# EAGLE board CCS811_Panel_ALLPCB (EAGLE 7.6.0)
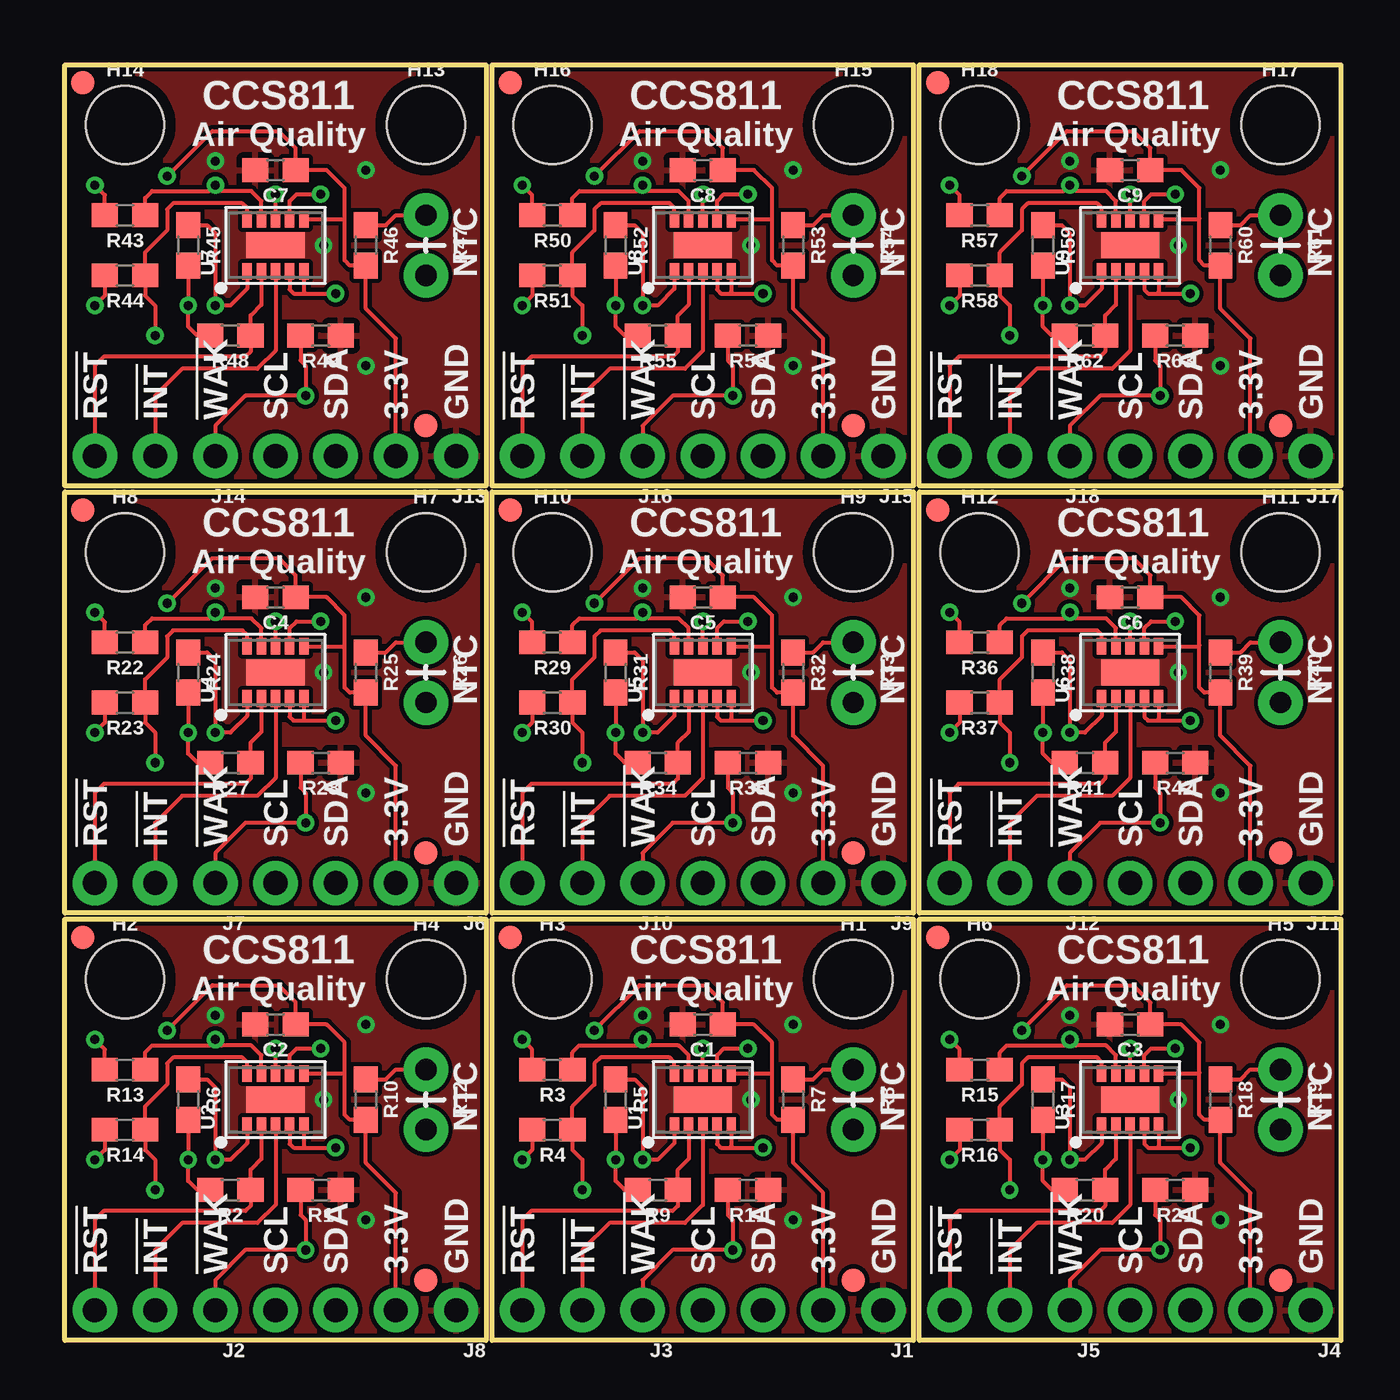
[diagram p0: board, top side]
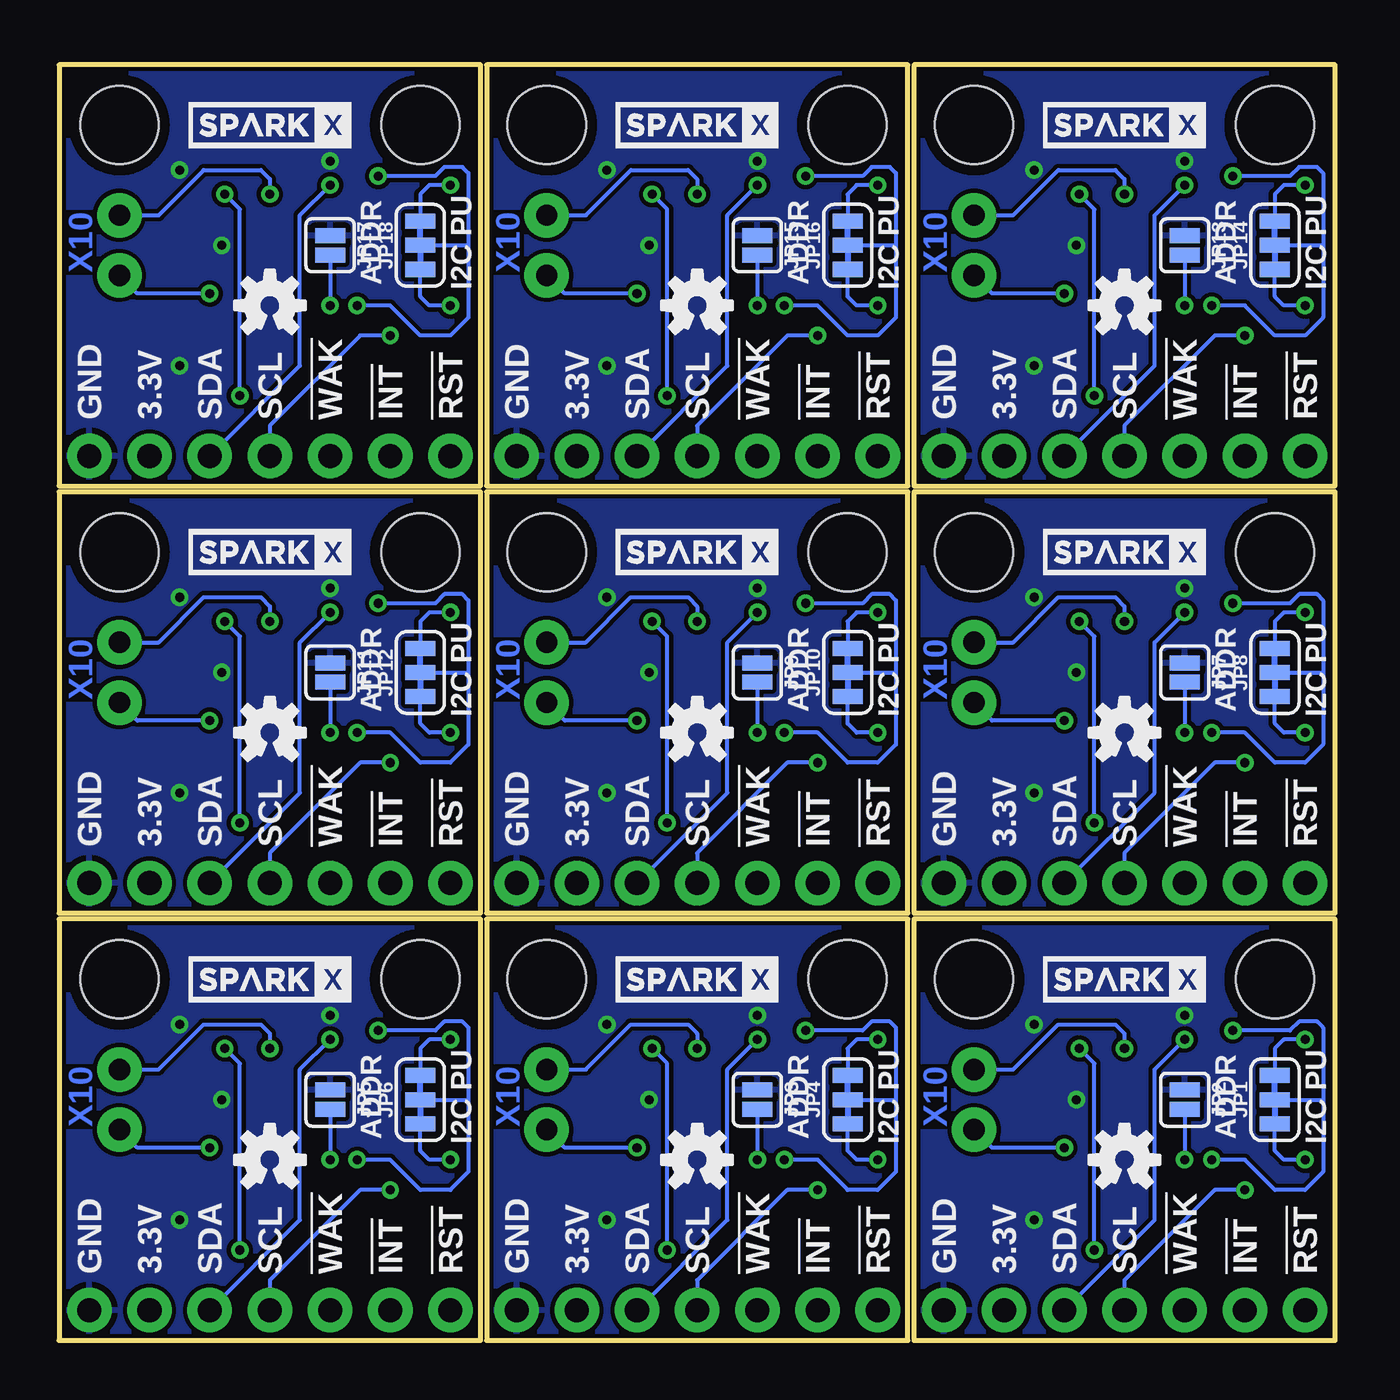
[diagram p1: board, bottom side, seen from below]

Size 53.85 x 53.85 mm. Coordinates in mm from the lower left corner, seen from the top.
Outline: 0,0 0,17.78 17.78,17.78 17.78,0 0,0
Outline: 18.03,0 18.03,17.78 35.81,17.78 35.81,0 18.03,0
Outline: 36.07,0 36.07,17.78 53.85,17.78 53.85,0 36.07,0
Outline: 0,18.03 0,35.81 17.78,35.81 17.78,18.03 0,18.03
Outline: 18.03,18.03 18.03,35.81 35.81,35.81 35.81,18.03 18.03,18.03
Outline: 36.07,18.03 36.07,35.81 53.85,35.81 53.85,18.03 36.07,18.03
Outline: 0,36.07 0,53.85 17.78,53.85 17.78,36.07 0,36.07
Outline: 18.03,36.07 18.03,53.85 35.81,53.85 35.81,36.07 18.03,36.07
Outline: 36.07,36.07 36.07,53.85 53.85,53.85 53.85,36.07 36.07,36.07
Copper layers (1*16): Top 0.035mm / dielectric 1.5mm / Bottom 0.035mm
Design rules "SparkFun-2-layer-TIGHT": minimum track width 7mil, minimum drill 15mil, track to track 7mil, track to pad 7mil, pad to pad 7mil, via to via 7mil, smd to smd 7mil, copper to edge 7mil, drill to drill 7mil, minimum pad ring 7mil, minimum via ring 7mil, stop-mask expansion 4mil, vias tented up to drill 25mil, thermal gap 10mil

## Footprints (pad centres in the part's own frame; a part is rotated, then mirrored left to right if it is on the bottom)
0603 = smd 1.1 x 1: 1 -0.85,0; 2 0.85,0
FIDUCIAL-1X2 = smd 1 x 1: 1 0,0
STAND-OFF = hole 3.302: 0,0
1X04_NO_SILK = drill 1.016 pad 1.88: 1 0,0; 2 2.54,0; 3 5.08,0; 4 7.62,0
1X03_NO_SILK = drill 1.016 pad 1.88: 1 0,0; 2 2.54,0; 3 5.08,0
SMT-JUMPER_3_2-NC_TRACE_SILK = smd 0.635 x 1.27: 1 -1.016,0; 2 0,0; 3 1.016,0
SMT-JUMPER_2_NO_SILK = smd 0.635 x 1.27: 1 -0.406,0; 2 0.406,0
AXIAL-0.1 = drill 0.9 pad 1.88: P$1 -1.27,0; P$2 1.27,0
LGA10 = smd 0.7 x 0.4: 1 -1.1,1.2; 2 -1.1,0.6; 3 -1.1,0; 4 -1.1,-0.6; 5 -1.1,-1.2; 6 1.1,-1.2; 7 1.1,-0.6; 8 1.1,0; 9 1.1,0.6; 10 1.1,1.2 | smd 1.1 x 2.45: EP 0,0

## Placement (x,y rotation side)
C1  1.0uF  [0603]  26.92,13.34 180 top
C2  1.0uF  [0603]  8.89,13.34 180 top
C3  1.0uF  [0603]  44.96,13.34 180 top
C4  1.0uF  [0603]  8.89,31.37 180 top
C5  1.0uF  [0603]  26.92,31.37 180 top
C6  1.0uF  [0603]  44.96,31.37 180 top
C7  1.0uF  [0603]  8.89,49.4 180 top
C8  1.0uF  [0603]  26.92,49.4 180 top
C9  1.0uF  [0603]  44.96,49.4 180 top
FD1  FIDUCIAL1X2  [FIDUCIAL-1X2]  0.76,17.02 0 top
FD2  FIDUCIAL1X2  [FIDUCIAL-1X2]  15.24,2.54 0 top
FD3  FIDUCIAL1X2  [FIDUCIAL-1X2]  18.8,17.02 0 top
FD4  FIDUCIAL1X2  [FIDUCIAL-1X2]  33.27,2.54 0 top
FD5  FIDUCIAL1X2  [FIDUCIAL-1X2]  36.83,17.02 0 top
FD6  FIDUCIAL1X2  [FIDUCIAL-1X2]  51.31,2.54 0 top
FD7  FIDUCIAL1X2  [FIDUCIAL-1X2]  0.76,35.05 0 top
FD8  FIDUCIAL1X2  [FIDUCIAL-1X2]  15.24,20.57 0 top
FD9  FIDUCIAL1X2  [FIDUCIAL-1X2]  18.8,35.05 0 top
FD10  FIDUCIAL1X2  [FIDUCIAL-1X2]  33.27,20.57 0 top
FD11  FIDUCIAL1X2  [FIDUCIAL-1X2]  36.83,35.05 0 top
FD12  FIDUCIAL1X2  [FIDUCIAL-1X2]  51.31,20.57 0 top
FD13  FIDUCIAL1X2  [FIDUCIAL-1X2]  0.76,53.09 0 top
FD14  FIDUCIAL1X2  [FIDUCIAL-1X2]  15.24,38.61 0 top
FD15  FIDUCIAL1X2  [FIDUCIAL-1X2]  18.8,53.09 0 top
FD16  FIDUCIAL1X2  [FIDUCIAL-1X2]  33.27,38.61 0 top
FD17  FIDUCIAL1X2  [FIDUCIAL-1X2]  36.83,53.09 0 top
FD18  FIDUCIAL1X2  [FIDUCIAL-1X2]  51.31,38.61 0 top
H1  STAND-OFF  [STAND-OFF]  33.27,15.24 0 top
H2  STAND-OFF  [STAND-OFF]  2.54,15.24 0 top
H3  STAND-OFF  [STAND-OFF]  20.57,15.24 0 top
H4  STAND-OFF  [STAND-OFF]  15.24,15.24 0 top
H5  STAND-OFF  [STAND-OFF]  51.31,15.24 0 top
H6  STAND-OFF  [STAND-OFF]  38.61,15.24 0 top
H7  STAND-OFF  [STAND-OFF]  15.24,33.27 0 top
H8  STAND-OFF  [STAND-OFF]  2.54,33.27 0 top
H9  STAND-OFF  [STAND-OFF]  33.27,33.27 0 top
H10  STAND-OFF  [STAND-OFF]  20.57,33.27 0 top
H11  STAND-OFF  [STAND-OFF]  51.31,33.27 0 top
H12  STAND-OFF  [STAND-OFF]  38.61,33.27 0 top
H13  STAND-OFF  [STAND-OFF]  15.24,51.31 0 top
H14  STAND-OFF  [STAND-OFF]  2.54,51.31 0 top
H15  STAND-OFF  [STAND-OFF]  33.27,51.31 0 top
H16  STAND-OFF  [STAND-OFF]  20.57,51.31 0 top
H17  STAND-OFF  [STAND-OFF]  51.31,51.31 0 top
H18  STAND-OFF  [STAND-OFF]  38.61,51.31 0 top
J1  [1X04_NO_SILK]  34.54,1.27 180 top
J2  [1X03_NO_SILK]  6.35,1.27 180 top
J3  [1X03_NO_SILK]  24.38,1.27 180 top
J4  [1X04_NO_SILK]  52.58,1.27 180 top
J5  [1X03_NO_SILK]  42.42,1.27 180 top
J6  [1X04_NO_SILK]  16.51,19.3 180 top
J7  [1X03_NO_SILK]  6.35,19.3 180 top
J8  [1X04_NO_SILK]  16.51,1.27 180 top
J9  [1X04_NO_SILK]  34.54,19.3 180 top
J10  [1X03_NO_SILK]  24.38,19.3 180 top
J11  [1X04_NO_SILK]  52.58,19.3 180 top
J12  [1X03_NO_SILK]  42.42,19.3 180 top
J13  [1X04_NO_SILK]  16.51,37.34 180 top
J14  [1X03_NO_SILK]  6.35,37.34 180 top
J15  [1X04_NO_SILK]  34.54,37.34 180 top
J16  [1X03_NO_SILK]  24.38,37.34 180 top
J17  [1X04_NO_SILK]  52.58,37.34 180 top
J18  [1X03_NO_SILK]  42.42,37.34 180 top
JP1  [SMT-JUMPER_3_2-NC_TRACE_SILK]  2.54,10.16 90 bottom
JP2  [SMT-JUMPER_2_NO_SILK]  6.35,10.16 270 bottom
JP3  [SMT-JUMPER_2_NO_SILK]  24.38,10.16 270 bottom
JP4  [SMT-JUMPER_3_2-NC_TRACE_SILK]  20.57,10.16 90 bottom
JP5  [SMT-JUMPER_2_NO_SILK]  42.42,10.16 270 bottom
JP6  [SMT-JUMPER_3_2-NC_TRACE_SILK]  38.61,10.16 90 bottom
JP7  [SMT-JUMPER_2_NO_SILK]  6.35,28.19 270 bottom
JP8  [SMT-JUMPER_3_2-NC_TRACE_SILK]  2.54,28.19 90 bottom
JP9  [SMT-JUMPER_2_NO_SILK]  24.38,28.19 270 bottom
JP10  [SMT-JUMPER_3_2-NC_TRACE_SILK]  20.57,28.19 90 bottom
JP11  [SMT-JUMPER_2_NO_SILK]  42.42,28.19 270 bottom
JP12  [SMT-JUMPER_3_2-NC_TRACE_SILK]  38.61,28.19 90 bottom
JP13  [SMT-JUMPER_2_NO_SILK]  6.35,46.23 270 bottom
JP14  [SMT-JUMPER_3_2-NC_TRACE_SILK]  2.54,46.23 90 bottom
JP15  [SMT-JUMPER_2_NO_SILK]  24.38,46.23 270 bottom
JP16  [SMT-JUMPER_3_2-NC_TRACE_SILK]  20.57,46.23 90 bottom
JP17  [SMT-JUMPER_2_NO_SILK]  42.42,46.23 270 bottom
JP18  [SMT-JUMPER_3_2-NC_TRACE_SILK]  38.61,46.23 90 bottom
LOGO1  OSHW-LOGOS  [OSHW-LOGO-S]  26.92,7.62 0 bottom
LOGO2  OSHW-LOGOS  [OSHW-LOGO-S]  44.96,7.62 0 bottom
LOGO3  OSHW-LOGOS  [OSHW-LOGO-S]  8.89,25.65 0 bottom
LOGO4  OSHW-LOGOS  [OSHW-LOGO-S]  8.89,7.62 0 bottom
LOGO5  OSHW-LOGOS  [OSHW-LOGO-S]  26.92,25.65 0 bottom
LOGO6  OSHW-LOGOS  [OSHW-LOGO-S]  44.96,25.65 0 bottom
LOGO7  OSHW-LOGOS  [OSHW-LOGO-S]  8.89,43.69 0 bottom
LOGO8  OSHW-LOGOS  [OSHW-LOGO-S]  26.92,43.69 0 bottom
LOGO9  OSHW-LOGOS  [OSHW-LOGO-S]  44.96,43.69 0 bottom
R1  100k  [0603]  10.79,6.35 180 top
R2  4.7k  [0603]  6.99,6.35 180 top
R3  4.7k  [0603]  20.57,11.43 180 top
R4  4.7k  [0603]  20.57,8.89 180 top
R5  100k  [0603]  23.24,10.16 270 top
R6  100k  [0603]  5.21,10.16 270 top
R7  10k  [0603]  30.73,10.16 270 top
R8  DNP  [AXIAL-0.1]  33.27,10.16 270 top
R9  4.7k  [0603]  25.02,6.35 180 top
R10  10k  [0603]  12.7,10.16 270 top
R11  100k  [0603]  28.83,6.35 180 top
R12  DNP  [AXIAL-0.1]  15.24,10.16 270 top
R13  4.7k  [0603]  2.54,11.43 180 top
R14  4.7k  [0603]  2.54,8.89 180 top
R15  4.7k  [0603]  38.61,11.43 180 top
R16  4.7k  [0603]  38.61,8.89 180 top
R17  100k  [0603]  41.27,10.16 270 top
R18  10k  [0603]  48.77,10.16 270 top
R19  DNP  [AXIAL-0.1]  51.31,10.16 270 top
R20  4.7k  [0603]  43.05,6.35 180 top
R21  100k  [0603]  46.86,6.35 180 top
R22  4.7k  [0603]  2.54,29.46 180 top
R23  4.7k  [0603]  2.54,26.92 180 top
R24  100k  [0603]  5.21,28.19 270 top
R25  10k  [0603]  12.7,28.19 270 top
R26  DNP  [AXIAL-0.1]  15.24,28.19 270 top
R27  4.7k  [0603]  6.99,24.38 180 top
R28  100k  [0603]  10.79,24.38 180 top
R29  4.7k  [0603]  20.57,29.46 180 top
R30  4.7k  [0603]  20.57,26.92 180 top
R31  100k  [0603]  23.24,28.19 270 top
R32  10k  [0603]  30.73,28.19 270 top
R33  DNP  [AXIAL-0.1]  33.27,28.19 270 top
R34  4.7k  [0603]  25.02,24.38 180 top
R35  100k  [0603]  28.83,24.38 180 top
R36  4.7k  [0603]  38.61,29.46 180 top
R37  4.7k  [0603]  38.61,26.92 180 top
R38  100k  [0603]  41.27,28.19 270 top
R39  10k  [0603]  48.77,28.19 270 top
R40  DNP  [AXIAL-0.1]  51.31,28.19 270 top
R41  4.7k  [0603]  43.05,24.38 180 top
R42  100k  [0603]  46.86,24.38 180 top
R43  4.7k  [0603]  2.54,47.5 180 top
R44  4.7k  [0603]  2.54,44.96 180 top
R45  100k  [0603]  5.21,46.23 270 top
R46  10k  [0603]  12.7,46.23 270 top
R47  DNP  [AXIAL-0.1]  15.24,46.23 270 top
R48  4.7k  [0603]  6.99,42.42 180 top
R49  100k  [0603]  10.79,42.42 180 top
R50  4.7k  [0603]  20.57,47.5 180 top
R51  4.7k  [0603]  20.57,44.96 180 top
R52  100k  [0603]  23.24,46.23 270 top
R53  10k  [0603]  30.73,46.23 270 top
R54  DNP  [AXIAL-0.1]  33.27,46.23 270 top
R55  4.7k  [0603]  25.02,42.42 180 top
R56  100k  [0603]  28.83,42.42 180 top
R57  4.7k  [0603]  38.61,47.5 180 top
R58  4.7k  [0603]  38.61,44.96 180 top
R59  100k  [0603]  41.27,46.23 270 top
R60  10k  [0603]  48.77,46.23 270 top
R61  DNP  [AXIAL-0.1]  51.31,46.23 270 top
R62  4.7k  [0603]  43.05,42.42 180 top
R63  100k  [0603]  46.86,42.42 180 top
U1  CCS811PRODUCTION  [LGA10]  26.92,10.16 90 top
U2  CCS811PRODUCTION  [LGA10]  8.89,10.16 90 top
U3  CCS811PRODUCTION  [LGA10]  44.96,10.16 90 top
U4  CCS811PRODUCTION  [LGA10]  8.89,28.19 90 top
U5  CCS811PRODUCTION  [LGA10]  26.92,28.19 90 top
U6  CCS811PRODUCTION  [LGA10]  44.96,28.19 90 top
U7  CCS811PRODUCTION  [LGA10]  8.89,46.23 90 top
U8  CCS811PRODUCTION  [LGA10]  26.92,46.23 90 top
U9  CCS811PRODUCTION  [LGA10]  44.96,46.23 90 top
U$1  SPARKX-LOGO3  [SPARKX-SMALL]  8.89,15.24 0 bottom
U$2  SPARKX-LOGO3  [SPARKX-SMALL]  26.92,15.24 0 bottom
U$3  SPARKX-LOGO3  [SPARKX-SMALL]  44.96,15.24 0 bottom
U$4  SPARKX-LOGO3  [SPARKX-SMALL]  8.89,33.27 0 bottom
U$5  SPARKX-LOGO3  [SPARKX-SMALL]  26.92,33.27 0 bottom
U$6  SPARKX-LOGO3  [SPARKX-SMALL]  44.96,33.27 0 bottom
U$7  SPARKX-LOGO3  [SPARKX-SMALL]  8.89,51.31 0 bottom
U$8  SPARKX-LOGO3  [SPARKX-SMALL]  26.92,51.31 0 bottom
U$9  SPARKX-LOGO3  [SPARKX-SMALL]  44.96,51.31 0 bottom

## Library data of the parts
C1-C9 = SparkFun-Capacitors; PROD_ID: CAP-00868
FD1-FD18 LOGO1-LOGO9 = SparkFun-Aesthetics
H1-H18 = SparkFun-Hardware
J1-J18 = SparkFun-Connectors
JP1-JP18 = SparkFun-Jumpers
R1 R5 R6 R11 R17 R21 R24 R28 R31 R35 R38 R42 R45 R49 R52 R56 R59 R63 = SparkFun-Resistors; PROD_ID: RES-07828
R2-R4 R9 R13-R16 R20 R22 R23 R27 R29 R30 R34 R36 R37 R41 R43 R44 R48 R50 R51 R55 R57 R58 R62 = SparkFun-Resistors; PROD_ID: RES-07857
R7 R10 R18 R25 R32 R39 R46 R53 R60 = SparkFun-Resistors; PROD_ID: RES-00824
R8 R12 R19 R26 R33 R40 R47 R54 R61 = esp32-environ-monitor-temp; PROD_ID: N/A; SF_ID: SEN-00250
U1-U9 U$1-U$9 = SparkX

## Nets
3.3V: C2.1 J8.2 JP1.2 R2.2 R6.2 R10.2 U2.6
3.3V1: C1.1 J1.2 JP4.2 R5.2 R7.2 R9.2 U1.6
3.3V2: C3.1 J4.2 JP6.2 R17.2 R18.2 R20.2 U3.6
3.3V3: C4.1 J6.2 JP8.2 R24.2 R25.2 R27.2 U4.6
3.3V4: C5.1 J9.2 JP10.2 R31.2 R32.2 R34.2 U5.6
3.3V5: C6.1 J11.2 JP12.2 R38.2 R39.2 R41.2 U6.6
3.3V6: C7.1 J13.2 JP14.2 R45.2 R46.2 R48.2 U7.6
3.3V7: C8.1 J15.2 JP16.2 R52.2 R53.2 R55.2 U8.6
3.3V8: C9.1 J17.2 JP18.2 R59.2 R60.2 R62.2 U9.6
!INT: J2.2 U2.3
!INT1: J3.2 U1.3
!INT2: J5.2 U3.3
!INT3: J7.2 U4.3
!INT4: J10.2 U5.3
!INT5: J12.2 U6.3
!INT6: J14.2 U7.3
!INT7: J16.2 U8.3
!INT8: J18.2 U9.3
!RST: J2.3 R2.1 U2.2
!RST1: J3.3 R9.1 U1.2
!RST2: J5.3 R20.1 U3.2
!RST3: J7.3 R27.1 U4.2
!RST4: J10.3 R34.1 U5.2
!RST5: J12.3 R41.1 U6.2
!RST6: J14.3 R48.1 U7.2
!RST7: J16.3 R55.1 U8.2
!RST8: J18.3 R62.1 U9.2
!WAKE: J2.1 R1.2 U2.7
!WAKE1: J3.1 R11.2 U1.7
!WAKE2: J5.1 R21.2 U3.7
!WAKE3: J7.1 R28.2 U4.7
!WAKE4: J10.1 R35.2 U5.7
!WAKE5: J12.1 R42.2 U6.7
!WAKE6: J14.1 R49.2 U7.7
!WAKE7: J16.1 R56.2 U8.7
!WAKE8: J18.1 R63.2 U9.7
AUX: R10.1 R12.P$1 U2.8
AUX1: R7.1 R8.P$1 U1.8
AUX2: R18.1 R19.P$1 U3.8
AUX3: R25.1 R26.P$1 U4.8
AUX4: R32.1 R33.P$1 U5.8
AUX5: R39.1 R40.P$1 U6.8
AUX6: R46.1 R47.P$1 U7.8
AUX7: R53.1 R54.P$1 U8.8
AUX8: R60.1 R61.P$1 U9.8
CCS811_ADDR: JP2.2 R6.1 U2.1
CCS811_ADDR1: JP3.2 R5.1 U1.1
CCS811_ADDR2: JP5.2 R17.1 U3.1
CCS811_ADDR3: JP7.2 R24.1 U4.1
CCS811_ADDR4: JP9.2 R31.1 U5.1
CCS811_ADDR5: JP11.2 R38.1 U6.1
CCS811_ADDR6: JP13.2 R45.1 U7.1
CCS811_ADDR7: JP15.2 R52.1 U8.1
CCS811_ADDR8: JP17.2 R59.1 U9.1
GND: C2.2 J8.1 JP2.1 R1.1 U2.EP
GND1: C1.2 J1.1 JP3.1 R11.1 U1.EP
GND2: C3.2 J4.1 JP5.1 R21.1 U3.EP
GND3: C4.2 J6.1 JP7.1 R28.1 U4.EP
GND4: C5.2 J9.1 JP9.1 R35.1 U5.EP
GND5: C6.2 J11.1 JP11.1 R42.1 U6.EP
GND6: C7.2 J13.1 JP13.1 R49.1 U7.EP
GND7: C8.2 J15.1 JP15.1 R56.1 U8.EP
GND8: C9.2 J17.1 JP17.1 R63.1 U9.EP
N$1: JP4.3 R3.2
N$2: JP4.1 R4.2
N$3: JP6.3 R15.2
N$4: JP1.3 R13.2
N$5: JP1.1 R14.2
N$6: JP6.1 R16.2
N$7: JP8.3 R22.2
N$8: JP8.1 R23.2
N$9: JP10.3 R29.2
N$10: JP10.1 R30.2
N$11: JP12.3 R36.2
N$12: JP12.1 R37.2
N$13: JP14.3 R43.2
N$14: JP14.1 R44.2
N$15: JP16.3 R50.2
N$16: JP16.1 R51.2
N$17: JP18.3 R57.2
N$18: JP18.1 R58.2
NTC_SENSE: R12.P$2 U2.4 U2.5
NTC_SENSE1: R8.P$2 U1.4 U1.5
NTC_SENSE2: R19.P$2 U3.4 U3.5
NTC_SENSE3: R26.P$2 U4.4 U4.5
NTC_SENSE4: R33.P$2 U5.4 U5.5
NTC_SENSE5: R40.P$2 U6.4 U6.5
NTC_SENSE6: R47.P$2 U7.4 U7.5
NTC_SENSE7: R54.P$2 U8.4 U8.5
NTC_SENSE8: R61.P$2 U9.4 U9.5
SCL: J8.4 R14.1 U2.10
SCL1: J1.4 R4.1 U1.10
SCL2: J4.4 R16.1 U3.10
SCL3: J6.4 R23.1 U4.10
SCL4: J9.4 R30.1 U5.10
SCL5: J11.4 R37.1 U6.10
SCL6: J13.4 R44.1 U7.10
SCL7: J15.4 R51.1 U8.10
SCL8: J17.4 R58.1 U9.10
SDA: J8.3 R13.1 U2.9
SDA1: J1.3 R3.1 U1.9
SDA2: J4.3 R15.1 U3.9
SDA3: J6.3 R22.1 U4.9
SDA4: J9.3 R29.1 U5.9
SDA5: J11.3 R36.1 U6.9
SDA6: J13.3 R43.1 U7.9
SDA7: J15.3 R50.1 U8.9
SDA8: J17.3 R57.1 U9.9

## Tracks (layer width: path | path; a pad name or v marks a point on that pad's centre or on a via)
3.3V  (via drill 0.38)
  Top 0.178: J8.2 13.97,6.22 12.7,7.49 R10.2 12.03,9.31 11.81,9.53 11.81,11.3 | U2.6 11.77,11.26 11.81,11.3 | v4.32,13.08 6.22,14.99 9.02,14.99 9.74,14.26 C2.1 11.05,13.34 11.81,12.57 11.81,11.3 | R6.2 v5.21,7.62 5.21,6.73 5.59,6.35 R2.2
  Bottom 0.178: v4.32,13.08 1.91,13.08 1.52,13.46 0.76,13.46 0.51,13.21 0.51,10.16 | 0.51,10.16 0.51,7.11 1.27,6.35 2.54,6.35 3.81,7.62 v5.21,7.62 | JP1.2 0.51,10.16
3.3V1  (via drill 0.38)
  Top 0.178: J1.2 32,6.22 30.73,7.49 R7.2 30.06,9.31 29.84,9.53 29.84,11.3 | U1.6 29.8,11.26 29.84,11.3 | v22.35,13.08 24.26,14.99 27.05,14.99 27.77,14.26 C1.1 29.08,13.34 29.84,12.57 29.84,11.3 | R5.2 v23.24,7.62 23.24,6.73 23.62,6.35 R9.2
  Bottom 0.178: v22.35,13.08 19.94,13.08 19.56,13.46 18.8,13.46 18.54,13.21 18.54,10.16 | 18.54,10.16 18.54,7.11 19.3,6.35 20.57,6.35 21.84,7.62 v23.24,7.62 | JP4.2 18.54,10.16
3.3V2  (via drill 0.38)
  Top 0.178: J4.2 50.04,6.22 48.77,7.49 R18.2 48.09,9.31 47.88,9.53 47.88,11.3 | U3.6 47.84,11.26 47.88,11.3 | v40.39,13.08 42.29,14.99 45.09,14.99 45.81,14.26 C3.1 47.12,13.34 47.88,12.57 47.88,11.3 | R17.2 v41.27,7.62 41.27,6.73 41.66,6.35 R20.2
  Bottom 0.178: v40.39,13.08 37.97,13.08 37.59,13.46 36.83,13.46 36.58,13.21 36.58,10.16 | 36.58,10.16 36.58,7.11 37.34,6.35 38.61,6.35 39.88,7.62 v41.27,7.62 | JP6.2 36.58,10.16
3.3V3  (via drill 0.38)
  Top 0.178: J6.2 13.97,24.26 12.7,25.53 R25.2 12.03,27.34 11.81,27.56 11.81,29.34 | U4.6 11.77,29.29 11.81,29.34 | v4.32,31.11 6.22,33.02 9.02,33.02 9.74,32.3 C4.1 11.05,31.37 11.81,30.61 11.81,29.34 | R24.2 v5.21,25.65 5.21,24.77 5.59,24.38 R27.2
  Bottom 0.178: v4.32,31.11 1.91,31.11 1.52,31.5 0.76,31.5 0.51,31.24 0.51,28.19 | 0.51,28.19 0.51,25.15 1.27,24.38 2.54,24.38 3.81,25.65 v5.21,25.65 | JP8.2 0.51,28.19
3.3V4  (via drill 0.38)
  Top 0.178: J9.2 32,24.26 30.73,25.53 R32.2 30.06,27.34 29.84,27.56 29.84,29.34 | U5.6 29.8,29.29 29.84,29.34 | v22.35,31.11 24.26,33.02 27.05,33.02 27.77,32.3 C5.1 29.08,31.37 29.84,30.61 29.84,29.34 | R31.2 v23.24,25.65 23.24,24.77 23.62,24.38 R34.2
  Bottom 0.178: v22.35,31.11 19.94,31.11 19.56,31.5 18.8,31.5 18.54,31.24 18.54,28.19 | 18.54,28.19 18.54,25.15 19.3,24.38 20.57,24.38 21.84,25.65 v23.24,25.65 | JP10.2 18.54,28.19
3.3V5  (via drill 0.38)
  Top 0.178: J11.2 50.04,24.26 48.77,25.53 R39.2 48.09,27.34 47.88,27.56 47.88,29.34 | U6.6 47.84,29.29 47.88,29.34 | v40.39,31.11 42.29,33.02 45.09,33.02 45.81,32.3 C6.1 47.12,31.37 47.88,30.61 47.88,29.34 | R38.2 v41.27,25.65 41.27,24.77 41.66,24.38 R41.2
  Bottom 0.178: v40.39,31.11 37.97,31.11 37.59,31.5 36.83,31.5 36.58,31.24 36.58,28.19 | 36.58,28.19 36.58,25.15 37.34,24.38 38.61,24.38 39.88,25.65 v41.27,25.65 | JP12.2 36.58,28.19
3.3V6  (via drill 0.38)
  Top 0.178: J13.2 13.97,42.29 12.7,43.56 R46.2 12.03,45.38 11.81,45.59 11.81,47.37 | U7.6 11.77,47.33 11.81,47.37 | v4.32,49.15 6.22,51.05 9.02,51.05 9.74,50.33 C7.1 11.05,49.4 11.81,48.64 11.81,47.37 | R45.2 v5.21,43.69 5.21,42.8 5.59,42.42 R48.2
  Bottom 0.178: v4.32,49.15 1.91,49.15 1.52,49.53 0.76,49.53 0.51,49.28 0.51,46.23 | 0.51,46.23 0.51,43.18 1.27,42.42 2.54,42.42 3.81,43.69 v5.21,43.69 | JP14.2 0.51,46.23
3.3V7  (via drill 0.38)
  Top 0.178: J15.2 32,42.29 30.73,43.56 R53.2 30.06,45.38 29.84,45.59 29.84,47.37 | U8.6 29.8,47.33 29.84,47.37 | v22.35,49.15 24.26,51.05 27.05,51.05 27.77,50.33 C8.1 29.08,49.4 29.84,48.64 29.84,47.37 | R52.2 v23.24,43.69 23.24,42.8 23.62,42.42 R55.2
  Bottom 0.178: v22.35,49.15 19.94,49.15 19.56,49.53 18.8,49.53 18.54,49.28 18.54,46.23 | 18.54,46.23 18.54,43.18 19.3,42.42 20.57,42.42 21.84,43.69 v23.24,43.69 | JP16.2 18.54,46.23
3.3V8  (via drill 0.38)
  Top 0.178: J17.2 50.04,42.29 48.77,43.56 R60.2 48.09,45.38 47.88,45.59 47.88,47.37 | U9.6 47.84,47.33 47.88,47.37 | v40.39,49.15 42.29,51.05 45.09,51.05 45.81,50.33 C9.1 47.12,49.4 47.88,48.64 47.88,47.37 | R59.2 v41.27,43.69 41.27,42.8 41.66,42.42 R62.2
  Bottom 0.178: v40.39,49.15 37.97,49.15 37.59,49.53 36.83,49.53 36.58,49.28 36.58,46.23 | 36.58,46.23 36.58,43.18 37.34,42.42 38.61,42.42 39.88,43.69 v41.27,43.69 | JP18.2 36.58,46.23
!INT
  Top 0.178: U2.3 8.89,5.71 8.13,4.95 4.95,4.95 3.81,3.81 J2.2
!INT1
  Top 0.178: U1.3 26.92,5.71 26.16,4.95 22.99,4.95 21.84,3.81 J3.2
!INT2
  Top 0.178: U3.3 44.96,5.71 44.2,4.95 41.02,4.95 39.88,3.81 J5.2
!INT3
  Top 0.178: U4.3 8.89,23.75 8.13,22.99 4.95,22.99 3.81,21.84 J7.2
!INT4
  Top 0.178: U5.3 26.92,23.75 26.16,22.99 22.99,22.99 21.84,21.84 J10.2
!INT5
  Top 0.178: U6.3 44.96,23.75 44.2,22.99 41.02,22.99 39.88,21.84 J12.2
!INT6
  Top 0.178: U7.3 8.89,41.78 8.13,41.02 4.95,41.02 3.81,39.88 J14.2
!INT7
  Top 0.178: U8.3 26.92,41.78 26.16,41.02 22.99,41.02 21.84,39.88 J16.2
!INT8
  Top 0.178: U9.3 44.96,41.78 44.2,41.02 41.02,41.02 39.88,39.88 J18.2
!RST
  Top 0.178: U2.2 8.29,7.66 7.83,7.2 R2.1 7.83,5.68 7.62,5.46 1.65,5.46 1.27,5.08 J2.3
!RST1
  Top 0.178: U1.2 26.32,7.66 25.87,7.2 R9.1 25.87,5.68 25.65,5.46 19.68,5.46 19.3,5.08 J3.3
!RST2
  Top 0.178: U3.2 44.36,7.66 43.9,7.2 R20.1 43.9,5.68 43.69,5.46 37.72,5.46 37.34,5.08 J5.3
!RST3
  Top 0.178: U4.2 8.29,25.69 7.83,25.23 R27.1 7.83,23.71 7.62,23.5 1.65,23.5 1.27,23.11 J7.3
!RST4
  Top 0.178: U5.2 26.32,25.69 25.87,25.23 R34.1 25.87,23.71 25.65,23.5 19.68,23.5 19.3,23.11 J10.3
!RST5
  Top 0.178: U6.2 44.36,25.69 43.9,25.23 R41.1 43.9,23.71 43.69,23.5 37.72,23.5 37.34,23.11 J12.3
!RST6
  Top 0.178: U7.2 8.29,43.72 7.83,43.27 R48.1 7.83,41.74 7.62,41.53 1.65,41.53 1.27,41.15 J14.3
!RST7
  Top 0.178: U8.2 26.32,43.72 25.87,43.27 R55.1 25.87,41.74 25.65,41.53 19.68,41.53 19.3,41.15 J16.3
!RST8
  Top 0.178: U9.2 44.36,43.72 43.9,43.27 R62.1 43.9,41.74 43.69,41.53 37.72,41.53 37.34,41.15 J18.3
!WAKE  (via drill 0.38)
  Top 0.178: U2.7 9.49,12.03 9.78,12.32 v10.79,12.32 | J2.1 6.35,2.54 7.62,3.81 v10.16,3.81 10.16,5.08 9.95,5.29 R1.2
  Bottom 0.178: v10.16,3.81 10.16,11.68 v10.79,12.32
!WAKE1  (via drill 0.38)
  Top 0.178: U1.7 27.52,12.03 27.81,12.32 v28.83,12.32 | J3.1 24.38,2.54 25.65,3.81 v28.19,3.81 28.19,5.08 27.98,5.29 R11.2
  Bottom 0.178: v28.19,3.81 28.19,11.68 v28.83,12.32
!WAKE2  (via drill 0.38)
  Top 0.178: U3.7 45.56,12.03 45.85,12.32 v46.86,12.32 | J5.1 42.42,2.54 43.69,3.81 v46.23,3.81 46.23,5.08 46.01,5.29 R21.2
  Bottom 0.178: v46.23,3.81 46.23,11.68 v46.86,12.32
!WAKE3  (via drill 0.38)
  Top 0.178: U4.7 9.49,30.06 9.78,30.35 v10.79,30.35 | J7.1 6.35,20.57 7.62,21.84 v10.16,21.84 10.16,23.11 9.95,23.33 R28.2
  Bottom 0.178: v10.16,21.84 10.16,29.72 v10.79,30.35
!WAKE4  (via drill 0.38)
  Top 0.178: U5.7 27.52,30.06 27.81,30.35 v28.83,30.35 | J10.1 24.38,20.57 25.65,21.84 v28.19,21.84 28.19,23.11 27.98,23.33 R35.2
  Bottom 0.178: v28.19,21.84 28.19,29.72 v28.83,30.35
!WAKE5  (via drill 0.38)
  Top 0.178: U6.7 45.56,30.06 45.85,30.35 v46.86,30.35 | J12.1 42.42,20.57 43.69,21.84 v46.23,21.84 46.23,23.11 46.01,23.33 R42.2
  Bottom 0.178: v46.23,21.84 46.23,29.72 v46.86,30.35
!WAKE6  (via drill 0.38)
  Top 0.178: U7.7 9.49,48.1 9.78,48.39 v10.79,48.39 | J14.1 6.35,38.61 7.62,39.88 v10.16,39.88 10.16,41.15 9.95,41.36 R49.2
  Bottom 0.178: v10.16,39.88 10.16,47.75 v10.79,48.39
!WAKE7  (via drill 0.38)
  Top 0.178: U8.7 27.52,48.1 27.81,48.39 v28.83,48.39 | J16.1 24.38,38.61 25.65,39.88 v28.19,39.88 28.19,41.15 27.98,41.36 R56.2
  Bottom 0.178: v28.19,39.88 28.19,47.75 v28.83,48.39
!WAKE8  (via drill 0.38)
  Top 0.178: U9.7 45.56,48.1 45.85,48.39 v46.86,48.39 | J18.1 42.42,38.61 43.69,39.88 v46.23,39.88 46.23,41.15 46.01,41.36 R63.2
  Bottom 0.178: v46.23,39.88 46.23,47.75 v46.86,48.39
AUX  (via drill 0.38)
  Top 0.178: R10.1 13.55,11.01 13.97,11.43 R12.P$1 | U2.8 v8.89,12.32
  Bottom 0.178: v8.89,12.32 8.89,12.95 9.27,13.34 11.68,13.34 13.59,11.43 R12.P$1
AUX1  (via drill 0.38)
  Top 0.178: R7.1 31.58,11.01 32,11.43 R8.P$1 | U1.8 v26.92,12.32
  Bottom 0.178: v26.92,12.32 26.92,12.95 27.3,13.34 29.72,13.34 31.62,11.43 R8.P$1
AUX2  (via drill 0.38)
  Top 0.178: R18.1 49.62,11.01 50.04,11.43 R19.P$1 | U3.8 v44.96,12.32
  Bottom 0.178: v44.96,12.32 44.96,12.95 45.34,13.34 47.75,13.34 49.66,11.43 R19.P$1
AUX3  (via drill 0.38)
  Top 0.178: R25.1 13.55,29.04 13.97,29.46 R26.P$1 | U4.8 v8.89,30.35
  Bottom 0.178: v8.89,30.35 8.89,30.99 9.27,31.37 11.68,31.37 13.59,29.46 R26.P$1
AUX4  (via drill 0.38)
  Top 0.178: R32.1 31.58,29.04 32,29.46 R33.P$1 | U5.8 v26.92,30.35
  Bottom 0.178: v26.92,30.35 26.92,30.99 27.3,31.37 29.72,31.37 31.62,29.46 R33.P$1
AUX5  (via drill 0.38)
  Top 0.178: R39.1 49.62,29.04 50.04,29.46 R40.P$1 | U6.8 v44.96,30.35
  Bottom 0.178: v44.96,30.35 44.96,30.99 45.34,31.37 47.75,31.37 49.66,29.46 R40.P$1
AUX6  (via drill 0.38)
  Top 0.178: R46.1 13.55,47.08 13.97,47.5 R47.P$1 | U7.8 v8.89,48.39
  Bottom 0.178: v8.89,48.39 8.89,49.02 9.27,49.4 11.68,49.4 13.59,47.5 R47.P$1
AUX7  (via drill 0.38)
  Top 0.178: R53.1 31.58,47.08 32,47.5 R54.P$1 | U8.8 v26.92,48.39
  Bottom 0.178: v26.92,48.39 26.92,49.02 27.3,49.4 29.72,49.4 31.62,47.5 R54.P$1
AUX8  (via drill 0.38)
  Top 0.178: R60.1 49.62,47.08 50.04,47.5 R61.P$1 | U9.8 v44.96,48.39
  Bottom 0.178: v44.96,48.39 44.96,49.02 45.34,49.4 47.75,49.4 49.66,47.5 R61.P$1
CCS811_ADDR  (via drill 0.38)
  Top 0.178: R6.1 6.01,11.01 6.35,10.67 v6.35,7.62 6.99,7.62 7.69,8.32 U2.1
  Bottom 0.178: JP2.2 v6.35,7.62
CCS811_ADDR1  (via drill 0.38)
  Top 0.178: R5.1 24.04,11.01 24.38,10.67 v24.38,7.62 25.02,7.62 25.72,8.32 U1.1
  Bottom 0.178: JP3.2 v24.38,7.62
CCS811_ADDR2  (via drill 0.38)
  Top 0.178: R17.1 42.08,11.01 42.42,10.67 v42.42,7.62 43.05,7.62 43.76,8.32 U3.1
  Bottom 0.178: JP5.2 v42.42,7.62
CCS811_ADDR3  (via drill 0.38)
  Top 0.178: R24.1 6.01,29.04 6.35,28.7 v6.35,25.65 6.99,25.65 7.69,26.36 U4.1
  Bottom 0.178: JP7.2 v6.35,25.65
CCS811_ADDR4  (via drill 0.38)
  Top 0.178: R31.1 24.04,29.04 24.38,28.7 v24.38,25.65 25.02,25.65 25.72,26.36 U5.1
  Bottom 0.178: JP9.2 v24.38,25.65
CCS811_ADDR5  (via drill 0.38)
  Top 0.178: R38.1 42.08,29.04 42.42,28.7 v42.42,25.65 43.05,25.65 43.76,26.36 U6.1
  Bottom 0.178: JP11.2 v42.42,25.65
CCS811_ADDR6  (via drill 0.38)
  Top 0.178: R45.1 6.01,47.08 6.35,46.74 v6.35,43.69 6.99,43.69 7.69,44.39 U7.1
  Bottom 0.178: JP13.2 v6.35,43.69
CCS811_ADDR7  (via drill 0.38)
  Top 0.178: R52.1 24.04,47.08 24.38,46.74 v24.38,43.69 25.02,43.69 25.72,44.39 U8.1
  Bottom 0.178: JP15.2 v24.38,43.69
CCS811_ADDR8  (via drill 0.38)
  Top 0.178: R59.1 42.08,47.08 42.42,46.74 v42.42,43.69 43.05,43.69 43.76,44.39 U9.1
  Bottom 0.178: JP17.2 v42.42,43.69
GND  (via drill 0.38)
  other vias: 6.35,13.72 10.92,10.16 12.7,13.34 12.7,5.08
  pour Top (isolate 0.178): 0,0 17.78,0 17.78,17.78 0,17.78
  pour Bottom (isolate 0.178): 0,17.78 17.78,17.78 17.78,0 0,0
GND1  (via drill 0.38)
  other vias: 24.38,13.72 28.96,10.16 30.73,13.34 30.73,5.08
  pour Top (isolate 0.178): 18.03,0 35.81,0 35.81,17.78 18.03,17.78
  pour Bottom (isolate 0.178): 18.03,17.78 35.81,17.78 35.81,0 18.03,0
GND2  (via drill 0.38)
  other vias: 42.42,13.72 46.99,10.16 48.77,13.34 48.77,5.08
  pour Top (isolate 0.178): 36.07,0 53.85,0 53.85,17.78 36.07,17.78
  pour Bottom (isolate 0.178): 36.07,17.78 53.85,17.78 53.85,0 36.07,0
GND3  (via drill 0.38)
  other vias: 6.35,31.75 10.92,28.19 12.7,31.37 12.7,23.11
  pour Top (isolate 0.178): 0,18.03 17.78,18.03 17.78,35.81 0,35.81
  pour Bottom (isolate 0.178): 0,35.81 17.78,35.81 17.78,18.03 0,18.03
GND4  (via drill 0.38)
  other vias: 24.38,31.75 28.96,28.19 30.73,31.37 30.73,23.11
  pour Top (isolate 0.178): 18.03,18.03 35.81,18.03 35.81,35.81 18.03,35.81
  pour Bottom (isolate 0.178): 18.03,35.81 35.81,35.81 35.81,18.03 18.03,18.03
GND5  (via drill 0.38)
  other vias: 42.42,31.75 46.99,28.19 48.77,31.37 48.77,23.11
  pour Top (isolate 0.178): 36.07,18.03 53.85,18.03 53.85,35.81 36.07,35.81
  pour Bottom (isolate 0.178): 36.07,35.81 53.85,35.81 53.85,18.03 36.07,18.03
GND6  (via drill 0.38)
  other vias: 6.35,49.78 10.92,46.23 12.7,49.4 12.7,41.15
  pour Top (isolate 0.178): 0,36.07 17.78,36.07 17.78,53.85 0,53.85
  pour Bottom (isolate 0.178): 0,53.85 17.78,53.85 17.78,36.07 0,36.07
GND7  (via drill 0.38)
  other vias: 24.38,49.78 28.96,46.23 30.73,49.4 30.73,41.15
  pour Top (isolate 0.178): 18.03,36.07 35.81,36.07 35.81,53.85 18.03,53.85
  pour Bottom (isolate 0.178): 18.03,53.85 35.81,53.85 35.81,36.07 18.03,36.07
GND8  (via drill 0.38)
  other vias: 42.42,49.78 46.99,46.23 48.77,49.4 48.77,41.15
  pour Top (isolate 0.178): 36.07,36.07 53.85,36.07 53.85,53.85 36.07,53.85
  pour Bottom (isolate 0.178): 36.07,53.85 53.85,53.85 53.85,36.07 36.07,36.07
N$1  (via drill 0.38)
  Top 0.178: R3.2 19.72,12.28 v19.3,12.7
  Bottom 0.178: v19.3,12.7 20.19,12.7 20.57,12.32 JP4.3
N$2  (via drill 0.38)
  Top 0.178: R4.2 19.72,8.04 v19.3,7.62
  Bottom 0.178: v19.3,7.62 20.19,7.62 20.57,8 JP4.1
N$3  (via drill 0.38)
  Top 0.178: R15.2 37.76,12.28 v37.34,12.7
  Bottom 0.178: v37.34,12.7 38.23,12.7 38.61,12.32 JP6.3
N$4  (via drill 0.38)
  Top 0.178: R13.2 1.69,12.28 v1.27,12.7
  Bottom 0.178: v1.27,12.7 2.16,12.7 2.54,12.32 JP1.3
N$5  (via drill 0.38)
  Top 0.178: R14.2 1.69,8.04 v1.27,7.62
  Bottom 0.178: v1.27,7.62 2.16,7.62 2.54,8 JP1.1
N$6  (via drill 0.38)
  Top 0.178: R16.2 37.76,8.04 v37.34,7.62
  Bottom 0.178: v37.34,7.62 38.23,7.62 38.61,8 JP6.1
N$7  (via drill 0.38)
  Top 0.178: R22.2 1.69,30.31 v1.27,30.73
  Bottom 0.178: v1.27,30.73 2.16,30.73 2.54,30.35 JP8.3
N$8  (via drill 0.38)
  Top 0.178: R23.2 1.69,26.07 v1.27,25.65
  Bottom 0.178: v1.27,25.65 2.16,25.65 2.54,26.04 JP8.1
N$9  (via drill 0.38)
  Top 0.178: R29.2 19.72,30.31 v19.3,30.73
  Bottom 0.178: v19.3,30.73 20.19,30.73 20.57,30.35 JP10.3
N$10  (via drill 0.38)
  Top 0.178: R30.2 19.72,26.07 v19.3,25.65
  Bottom 0.178: v19.3,25.65 20.19,25.65 20.57,26.04 JP10.1
N$11  (via drill 0.38)
  Top 0.178: R36.2 37.76,30.31 v37.34,30.73
  Bottom 0.178: v37.34,30.73 38.23,30.73 38.61,30.35 JP12.3
N$12  (via drill 0.38)
  Top 0.178: R37.2 37.76,26.07 v37.34,25.65
  Bottom 0.178: v37.34,25.65 38.23,25.65 38.61,26.04 JP12.1
N$13  (via drill 0.38)
  Top 0.178: R43.2 1.69,48.35 v1.27,48.77
  Bottom 0.178: v1.27,48.77 2.16,48.77 2.54,48.39 JP14.3
N$14  (via drill 0.38)
  Top 0.178: R44.2 1.69,44.11 v1.27,43.69
  Bottom 0.178: v1.27,43.69 2.16,43.69 2.54,44.07 JP14.1
N$15  (via drill 0.38)
  Top 0.178: R50.2 19.72,48.35 v19.3,48.77
  Bottom 0.178: v19.3,48.77 20.19,48.77 20.57,48.39 JP16.3
N$16  (via drill 0.38)
  Top 0.178: R51.2 19.72,44.11 v19.3,43.69
  Bottom 0.178: v19.3,43.69 20.19,43.69 20.57,44.07 JP16.1
N$17  (via drill 0.38)
  Top 0.178: R57.2 37.76,48.35 v37.34,48.77
  Bottom 0.178: v37.34,48.77 38.23,48.77 38.61,48.39 JP18.3
N$18  (via drill 0.38)
  Top 0.178: R58.2 37.76,44.11 v37.34,43.69
  Bottom 0.178: v37.34,43.69 38.23,43.69 38.61,44.07 JP18.1
NTC_SENSE  (via drill 0.38)
  Top 0.178: 10.16,8.13 9.65,8.13 9.49,8.29 U2.4 | 10.16,8.13 v11.43,8.13 | U2.5 10.09,8.2 10.16,8.13
  Bottom 0.178: v11.43,8.13 14.48,8.13 R12.P$2
NTC_SENSE1  (via drill 0.38)
  Top 0.178: 28.19,8.13 27.69,8.13 27.52,8.29 U1.4 | 28.19,8.13 v29.46,8.13 | U1.5 28.12,8.2 28.19,8.13
  Bottom 0.178: v29.46,8.13 32.51,8.13 R8.P$2
NTC_SENSE2  (via drill 0.38)
  Top 0.178: 46.23,8.13 45.72,8.13 45.56,8.29 U3.4 | 46.23,8.13 v47.5,8.13 | U3.5 46.16,8.2 46.23,8.13
  Bottom 0.178: v47.5,8.13 50.55,8.13 R19.P$2
NTC_SENSE3  (via drill 0.38)
  Top 0.178: 10.16,26.16 9.65,26.16 9.49,26.32 U4.4 | 10.16,26.16 v11.43,26.16 | U4.5 10.09,26.23 10.16,26.16
  Bottom 0.178: v11.43,26.16 14.48,26.16 R26.P$2
NTC_SENSE4  (via drill 0.38)
  Top 0.178: 28.19,26.16 27.69,26.16 27.52,26.32 U5.4 | 28.19,26.16 v29.46,26.16 | U5.5 28.12,26.23 28.19,26.16
  Bottom 0.178: v29.46,26.16 32.51,26.16 R33.P$2
NTC_SENSE5  (via drill 0.38)
  Top 0.178: 46.23,26.16 45.72,26.16 45.56,26.32 U6.4 | 46.23,26.16 v47.5,26.16 | U6.5 46.16,26.23 46.23,26.16
  Bottom 0.178: v47.5,26.16 50.55,26.16 R40.P$2
NTC_SENSE6  (via drill 0.38)
  Top 0.178: 10.16,44.2 9.65,44.2 9.49,44.36 U7.4 | 10.16,44.2 v11.43,44.2 | U7.5 10.09,44.27 10.16,44.2
  Bottom 0.178: v11.43,44.2 14.48,44.2 R47.P$2
NTC_SENSE7  (via drill 0.38)
  Top 0.178: 28.19,44.2 27.69,44.2 27.52,44.36 U8.4 | 28.19,44.2 v29.46,44.2 | U8.5 28.12,44.27 28.19,44.2
  Bottom 0.178: v29.46,44.2 32.51,44.2 R54.P$2
NTC_SENSE8  (via drill 0.38)
  Top 0.178: 46.23,44.2 45.72,44.2 45.56,44.36 U9.4 | 46.23,44.2 v47.5,44.2 | U9.5 46.16,44.27 46.23,44.2
  Bottom 0.178: v47.5,44.2 50.55,44.2 R61.P$2
SCL  (via drill 0.38)
  Top 0.178: v3.81,6.35 3.81,7.62 3.39,8.04 R14.1 3.39,9.87 4.32,10.79 4.32,11.68 4.57,11.94 7.49,11.94 7.69,11.74 U2.10
  Bottom 0.178: v3.81,6.35 5.08,6.35 8.89,2.54 J8.4
SCL1  (via drill 0.38)
  Top 0.178: v21.84,6.35 21.84,7.62 21.42,8.04 R4.1 21.42,9.87 22.35,10.79 22.35,11.68 22.61,11.94 25.53,11.94 25.72,11.74 U1.10
  Bottom 0.178: v21.84,6.35 23.11,6.35 26.92,2.54 J1.4
SCL2  (via drill 0.38)
  Top 0.178: v39.88,6.35 39.88,7.62 39.46,8.04 R16.1 39.46,9.87 40.39,10.79 40.39,11.68 40.64,11.94 43.56,11.94 43.76,11.74 U3.10
  Bottom 0.178: v39.88,6.35 41.15,6.35 44.96,2.54 J4.4
SCL3  (via drill 0.38)
  Top 0.178: v3.81,24.38 3.81,25.65 3.39,26.07 R23.1 3.39,27.9 4.32,28.83 4.32,29.72 4.57,29.97 7.49,29.97 7.69,29.77 U4.10
  Bottom 0.178: v3.81,24.38 5.08,24.38 8.89,20.57 J6.4
SCL4  (via drill 0.38)
  Top 0.178: v21.84,24.38 21.84,25.65 21.42,26.07 R30.1 21.42,27.9 22.35,28.83 22.35,29.72 22.61,29.97 25.53,29.97 25.72,29.77 U5.10
  Bottom 0.178: v21.84,24.38 23.11,24.38 26.92,20.57 J9.4
SCL5  (via drill 0.38)
  Top 0.178: v39.88,24.38 39.88,25.65 39.46,26.07 R37.1 39.46,27.9 40.39,28.83 40.39,29.72 40.64,29.97 43.56,29.97 43.76,29.77 U6.10
  Bottom 0.178: v39.88,24.38 41.15,24.38 44.96,20.57 J11.4
SCL6  (via drill 0.38)
  Top 0.178: v3.81,42.42 3.81,43.69 3.39,44.11 R44.1 3.39,45.94 4.32,46.86 4.32,47.75 4.57,48.01 7.49,48.01 7.69,47.81 U7.10
  Bottom 0.178: v3.81,42.42 5.08,42.42 8.89,38.61 J13.4
SCL7  (via drill 0.38)
  Top 0.178: v21.84,42.42 21.84,43.69 21.42,44.11 R51.1 21.42,45.94 22.35,46.86 22.35,47.75 22.61,48.01 25.53,48.01 25.72,47.81 U8.10
  Bottom 0.178: v21.84,42.42 23.11,42.42 26.92,38.61 J15.4
SCL8  (via drill 0.38)
  Top 0.178: v39.88,42.42 39.88,43.69 39.46,44.11 R58.1 39.46,45.94 40.39,46.86 40.39,47.75 40.64,48.01 43.56,48.01 43.76,47.81 U9.10
  Bottom 0.178: v39.88,42.42 41.15,42.42 44.96,38.61 J17.4
SDA  (via drill 0.38)
  Top 0.178: R13.1 3.39,12.15 3.68,12.45 6.1,12.45 v6.35,12.7 6.6,12.45 7.87,12.45 8.29,12.03 U2.9
  Bottom 0.178: J8.3 7.62,5.08 7.62,11.43 v6.35,12.7
SDA1  (via drill 0.38)
  Top 0.178: R3.1 21.42,12.15 21.72,12.45 24.13,12.45 v24.38,12.7 24.64,12.45 25.91,12.45 26.32,12.03 U1.9
  Bottom 0.178: J1.3 25.65,5.08 25.65,11.43 v24.38,12.7
SDA2  (via drill 0.38)
  Top 0.178: R15.1 39.46,12.15 39.75,12.45 42.16,12.45 v42.42,12.7 42.67,12.45 43.94,12.45 44.36,12.03 U3.9
  Bottom 0.178: J4.3 43.69,5.08 43.69,11.43 v42.42,12.7
SDA3  (via drill 0.38)
  Top 0.178: R22.1 3.39,30.19 3.68,30.48 6.1,30.48 v6.35,30.73 6.6,30.48 7.87,30.48 8.29,30.06 U4.9
  Bottom 0.178: J6.3 7.62,23.11 7.62,29.46 v6.35,30.73
SDA4  (via drill 0.38)
  Top 0.178: R29.1 21.42,30.19 21.72,30.48 24.13,30.48 v24.38,30.73 24.64,30.48 25.91,30.48 26.32,30.06 U5.9
  Bottom 0.178: J9.3 25.65,23.11 25.65,29.46 v24.38,30.73
SDA5  (via drill 0.38)
  Top 0.178: R36.1 39.46,30.19 39.75,30.48 42.16,30.48 v42.42,30.73 42.67,30.48 43.94,30.48 44.36,30.06 U6.9
  Bottom 0.178: J11.3 43.69,23.11 43.69,29.46 v42.42,30.73
SDA6  (via drill 0.38)
  Top 0.178: R43.1 3.39,48.22 3.68,48.51 6.1,48.51 v6.35,48.77 6.6,48.51 7.87,48.51 8.29,48.1 U7.9
  Bottom 0.178: J13.3 7.62,41.15 7.62,47.5 v6.35,48.77
SDA7  (via drill 0.38)
  Top 0.178: R50.1 21.42,48.22 21.72,48.51 24.13,48.51 v24.38,48.77 24.64,48.51 25.91,48.51 26.32,48.1 U8.9
  Bottom 0.178: J15.3 25.65,41.15 25.65,47.5 v24.38,48.77
SDA8  (via drill 0.38)
  Top 0.178: R57.1 39.46,48.22 39.75,48.51 42.16,48.51 v42.42,48.77 42.67,48.51 43.94,48.51 44.36,48.1 U9.9
  Bottom 0.178: J17.3 43.69,41.15 43.69,47.5 v42.42,48.77

## Text on the board
Bottom: X10 | X10 | X10 | X10 | X10 | X10 | X10 | X10 | X10
tPlace: CCS811 | CCS811 | CCS811 | Air Quality | Air Quality | Air Quality | NTC | NTC | NTC | !RST | !INT | !WAK | SCL | SDA | 3.3V | GND | !RST | !INT | !WAK | SCL | SDA | 3.3V | GND | !RST | !INT | !WAK | SCL | SDA | 3.3V | GND | CCS811 | CCS811 | CCS811 | Air Quality | Air Quality | Air Quality | NTC | NTC | NTC | !RST | !INT | !WAK | SCL | SDA | 3.3V | GND | !RST | !INT | !WAK | SCL | SDA | 3.3V | GND | !RST | !INT | !WAK | SCL | SDA | 3.3V | GND | CCS811 | CCS811 | CCS811 | Air Quality | Air Quality | Air Quality | NTC | NTC | NTC | !RST | !INT | !WAK | SCL | SDA | 3.3V | GND | !RST | !INT | !WAK | SCL | SDA | 3.3V | GND | !RST | !INT | !WAK | SCL | SDA | 3.3V | GND
bPlace: I2C PU | ADDR | I2C PU | ADDR | I2C PU | ADDR | !RST | !INT | !WAK | SCL | SDA | 3.3V | GND | !RST | !INT | !WAK | SCL | SDA | 3.3V | GND | !RST | !INT | !WAK | SCL | SDA | 3.3V | GND | I2C PU | ADDR | I2C PU | ADDR | I2C PU | ADDR | !RST | !INT | !WAK | SCL | SDA | 3.3V | GND | !RST | !INT | !WAK | SCL | SDA | 3.3V | GND | !RST | !INT | !WAK | SCL | SDA | 3.3V | GND | I2C PU | ADDR | I2C PU | ADDR | I2C PU | ADDR | !RST | !INT | !WAK | SCL | SDA | 3.3V | GND | !RST | !INT | !WAK | SCL | SDA | 3.3V | GND | !RST | !INT | !WAK | SCL | SDA | 3.3V | GND